# Altium PCB Main.PcbDoc (part 2 of 2)
Units mil, origin at the board's own origin, x right, y up, seen from the top; angles counter-clockwise.
Board outline 5500 x 5000 mil, 4 copper layers (Top Layer, Gnd 1, Interconnects, Gnd 2), stack 65.2 mil thick; 154 components, 128 nets, 570 pads, 1105 vias.
Unrouted connection lines stored in the file: 1.
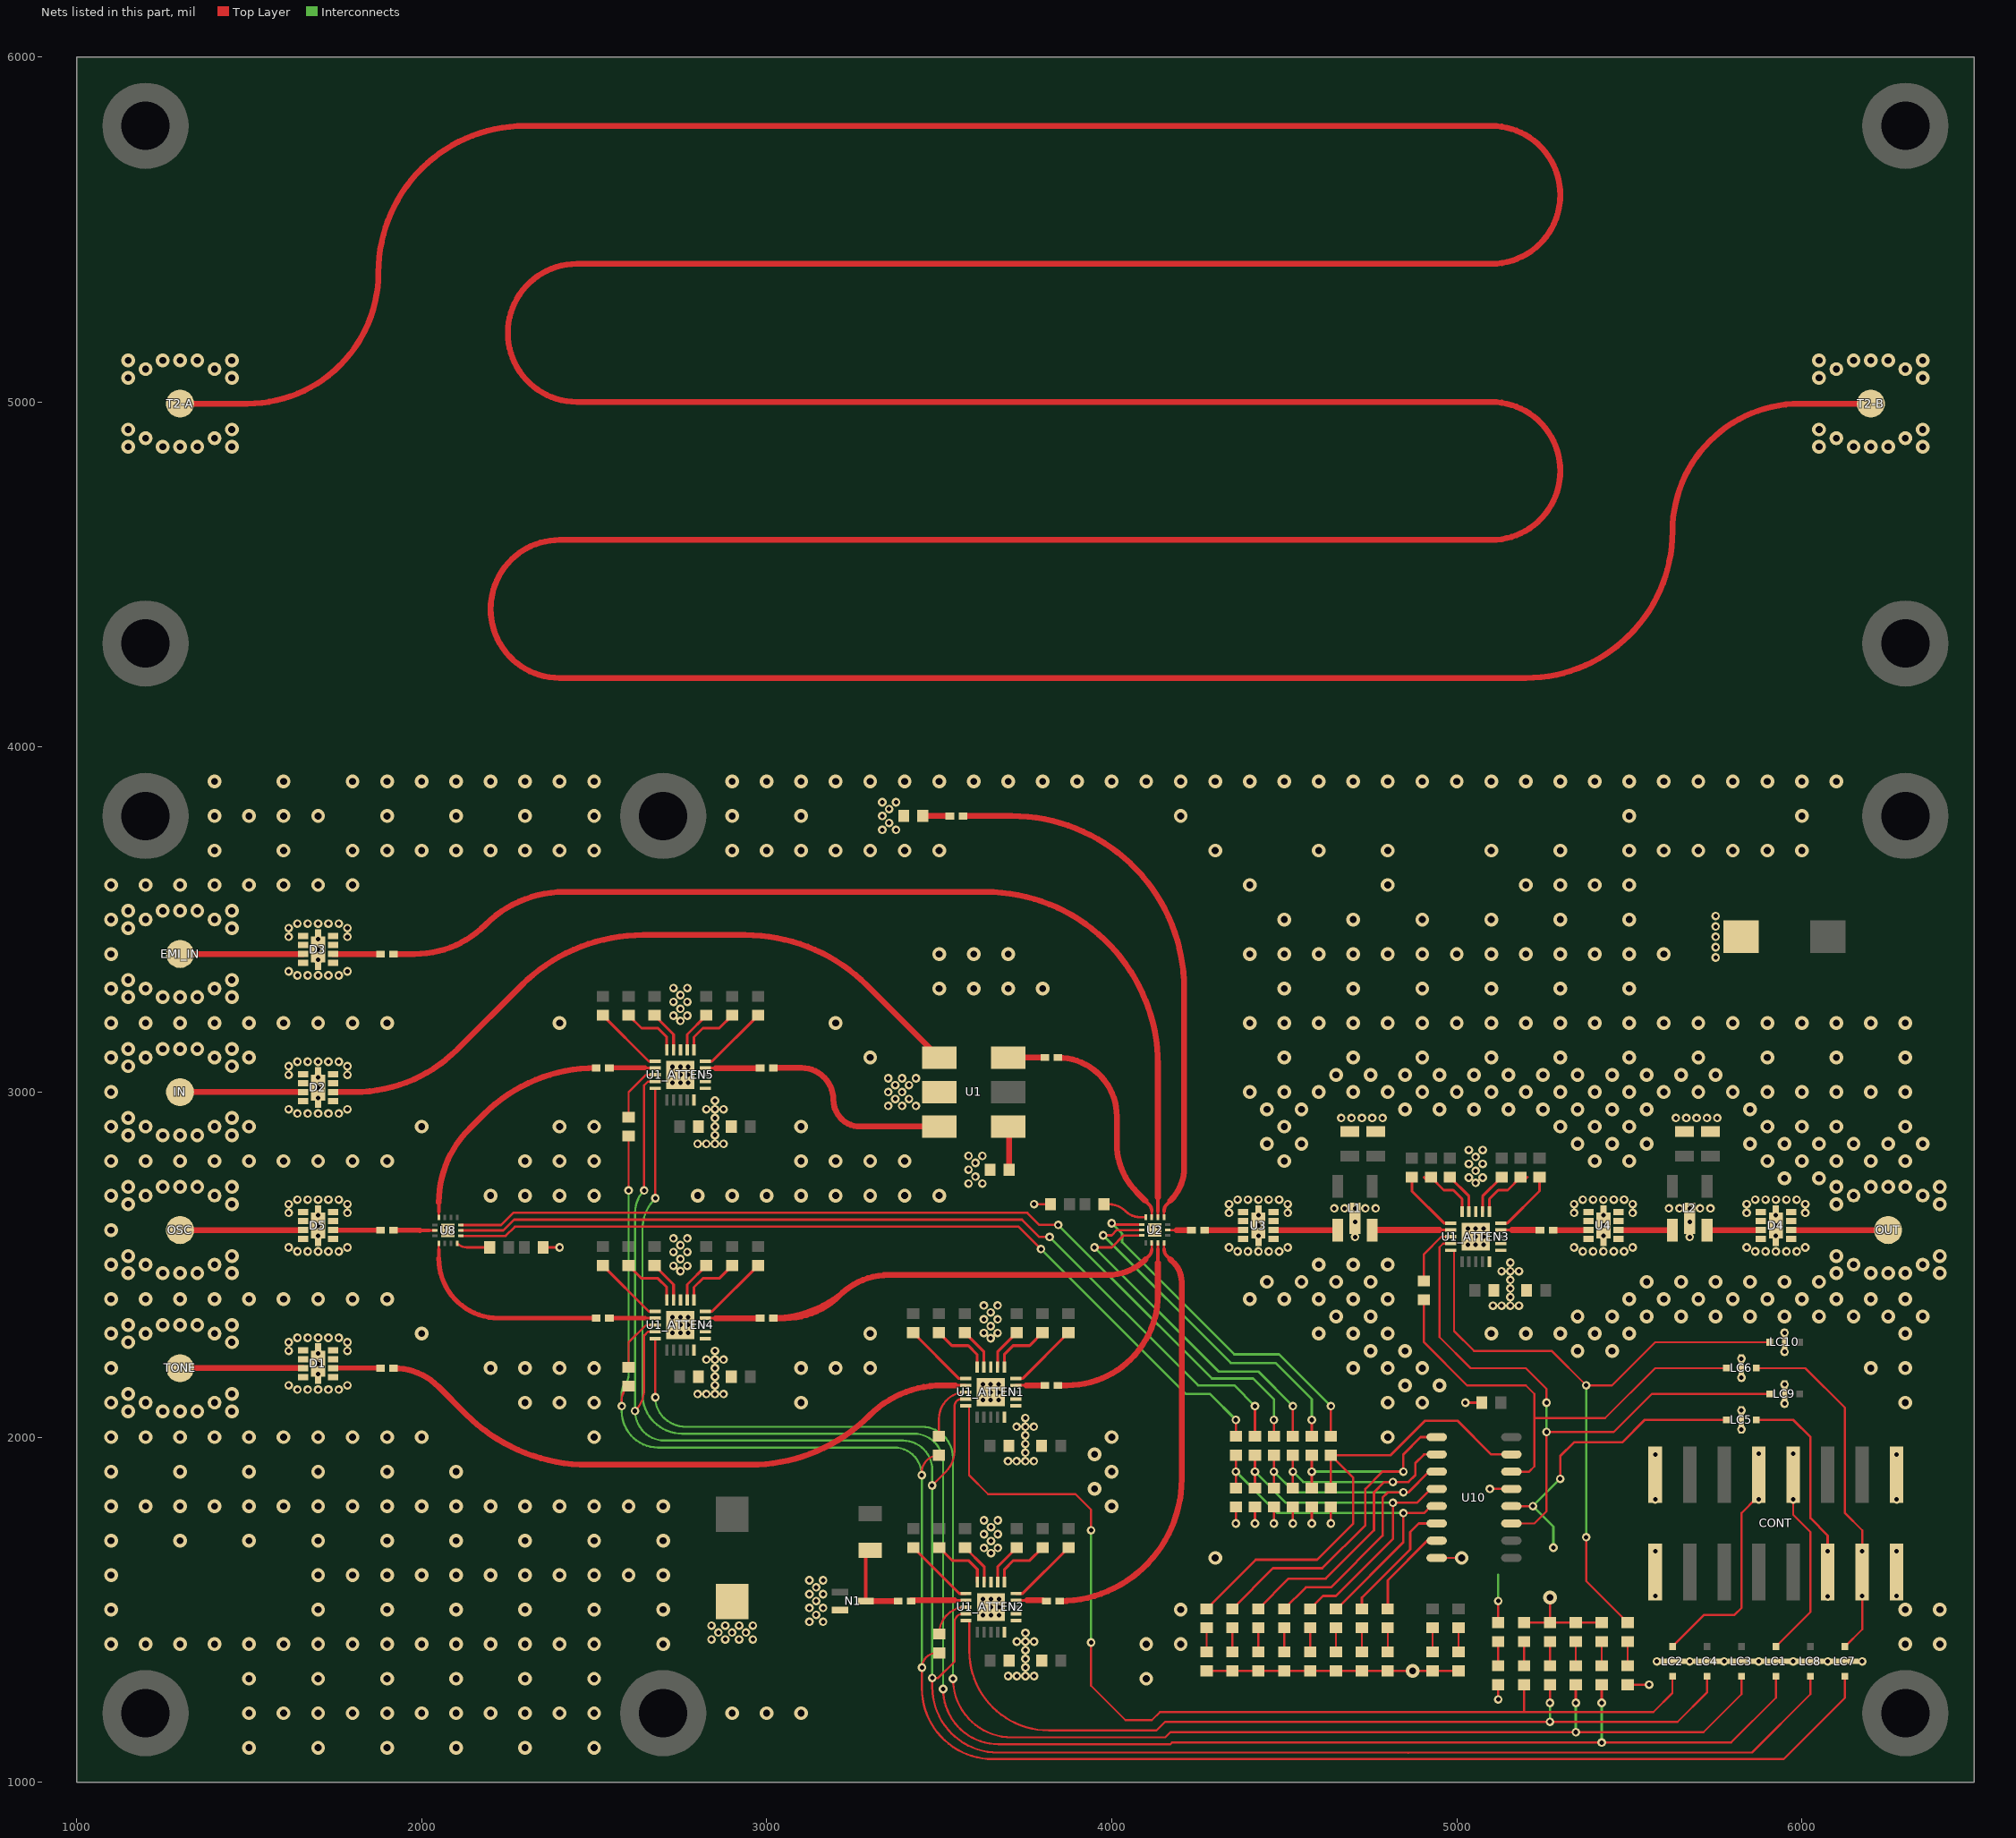
[diagram p4: the nets of this part, all layers, seen from the top]

## Via types
v1: diameter 40, hole 20, Top Layer to Gnd 2, tented both sides, 596 vias
v2: diameter 25, hole 13, Top Layer to Gnd 2, tented both sides, 454 vias
v3: diameter 25, hole 13, Top Layer to Gnd 2, 45 vias
v4: diameter 19.68, hole 7.87, Top Layer to Gnd 2, tented bottom, 8 vias
v5: diameter 45, hole 25, Top Layer to Gnd 2, tented both sides, 2 vias

## Nets (pads, with @x,y where several pads share a name; then routed paths per layer and width w, separated by ;. In a path a pad name is that pad's centre, name@x,y a point inside that pad or via, vN(x,y) a via of type N, cw(c..) or ccw(c..) an arc to the next point about the centre after c; other vN are vias at no path point) (continued)
GND: C4_ATTEN1.1 C4_ATTEN2.1 C4_ATTEN3.1 C4_ATTEN4.1 C4_ATTEN5.1 C6_ATTEN1.1 C6_ATTEN2.1 C6_ATTEN3.1 C6_ATTEN4.1 C6_ATTEN5.1 C9.1 C10.1 C12.1 C13.1 C18.1 C20.1 C21.1 C22.1 C23.1 C24.1 C25.1 C26.1 C30.1 C40.2 C41.2 CONT.1 CONT.2 CONT.15 CONT.16 D1.1 D1.3 D1.4 D1.5 D1.6 D1.8 D1.9 D1.10 D2.1 D2.3 D2.4 D2.5 D2.6 D2.8 D2.9 D2.10 D3.1 D3.3 D3.4 D3.5 D3.6 D3.8 D3.9 D3.10 D4.1 D4.3 D4.4 D4.5 D4.6 D4.8 D4.9 D4.10 D5.1 D5.3 D5.4 D5.5 D5.6 D5.8 D5.9 D5.10 DP1.2 DP2.2 DP3.2 DP4.2 DP5.2 DP6.2 DP7.2 DP8.2 DP9.2 DP10.2 DP11.2 DP12.2 DP13.2 DP14.2 DP15.2 DP16.2 EMI_IN.2 EMI_IN.3 EMI_IN.4 EMI_IN.5 IN.2 IN.3 IN.4 IN.5 L1.5 L2.5 LC1.2 LC2.2 LC3.2 LC4.2 LC5.2 LC6.2 LC7.2 LC8.2 LC9.2 LC10.2 N1.2 OSC.2 OSC.3 OSC.4 OSC.5 OUT.2 OUT.3 OUT.4 OUT.5 R1.1 R2.1 T2-A.2 T2-A.3 T2-A.4 T2-A.5 T2-B.2 T2-B.3 T2-B.4 T2-B.5 TONE.2 TONE.3 TONE.4 TONE.5 U1.2 U1_ATTEN1.10 U1_ATTEN1.11 U1_ATTEN1.12 U1_ATTEN1.18 U1_ATTEN1.21 U1_ATTEN2.10 U1_ATTEN2.11 U1_ATTEN2.12 U1_ATTEN2.18 U1_ATTEN2.21 U1_ATTEN3.10 U1_ATTEN3.11 U1_ATTEN3.12 U1_ATTEN3.18 U1_ATTEN3.21 U1_ATTEN4.10 U1_ATTEN4.11 U1_ATTEN4.12 U1_ATTEN4.18 U1_ATTEN4.21 U1_ATTEN5.10 U1_ATTEN5.11 U1_ATTEN5.12 U1_ATTEN5.18 U1_ATTEN5.21 U2.15 U3.1 U3.3 U3.4 U3.5 U3.6 U3.8 U3.9 U3.10 U4.1 U4.3 U4.4 U4.5 U4.6 U4.8 U4.9 U4.10 U8.15 U10.8 U10.13 | length 2284.1
  Top Layer w6: DP1.2@4275,1322.44 DP2.2@4350,1322.44 DP3.2@4425,1322.44 DP4.2@4500,1322.44 DP6.2@4650,1322.44 DP7.2@4725,1322.44 DP8.2@4800,1322.44 v1(4872.44,1322.44) DP10.2@4999.88,1322.44 ; U10.8@4941.73,1650 v1(5014.17,1650) ; DP14.2@5195,1462.56 DP13.2@5270,1462.56 ; v1(5270,1535) DP13.2@5270,1462.56 ; DP15.2@5420,1462.56 DP12.2@5345,1462.56 DP13.2@5270,1462.56 ; v2(5580,1350) LC2.2@5625,1350 LC4.2@5725,1350 LC3.2@5825,1350 LC1.2@5925,1350 LC8.2@6025,1350 LC7.2@6125,1350 v2(6175,1350)
  Top Layer w7: C30.1@2352.56,2550 v2(2400,2550) ; v2(3775,2675) C20.1@3822.44,2675 ; v2(4360,1750) C24.1@4360,1797.44 ; v2(4415,1750) C25.1@4415,1797.44 ; v2(4470,1750) C26.1@4470,1797.44 ; v2(4525,1750) C23.1@4525,1797.44 ; v2(4580,1750) C22.1@4580,1797.44 ; v2(4635,1750) C21.1@4635,1797.44 ; v2(5025,2100) C18.1@5072.44,2100 ; v2(5095.83,1850) U10.13@5158.27,1850 ; v2(5120,1240) DP11.2@5120,1282.44 ; DP16.2@5495,1282.44 v2(5557.44,1282.44)
  other v1: 1500,1100 1700,1100 1900,1100 2100,1100 2300,1100 2500,1100 1500,1200 1600,1200 1700,1200 1800,1200 1900,1200 2000,1200 2100,1200 2200,1200 2300,1200 2400,1200 2500,1200 2900,1200 3000,1200 3100,1200 1500,1300 1700,1300 1900,1300 2100,1300 2300,1300 2500,1300 4100,1300 1100,1400 1200,1400 1300,1400 1400,1400 1500,1400 1600,1400 1700,1400 1800,1400 1900,1400 2000,1400 2100,1400 2200,1400 2300,1400 2400,1400 2500,1400 2700,1400 4100,1400 4200,1400 6300,1400 6400,1400 1100,1500 1700,1500 1900,1500 2100,1500 2300,1500 2500,1500 2700,1500 4200,1500 6300,1500 6400,1500 1100,1600 1700,1600 1800,1600 1900,1600 2000,1600 2100,1600 2200,1600 2300,1600 2400,1600 2500,1600 2600,1600 2700,1600 4300,1650 1100,1700 1300,1700 1500,1700 1700,1700 1900,1700 2100,1700 2300,1700 2500,1700 2700,1700 1100,1800 1200,1800 1300,1800 1400,1800 1500,1800 1600,1800 1700,1800 1800,1800 1900,1800 2000,1800 2100,1800 2200,1800 2300,1800 2400,1800 2500,1800 2600,1800 2700,1800 4000,1800 3950,1850 1100,1900 1300,1900 1500,1900 1700,1900 1900,1900 2100,1900 4000,1900 3950,1950 1100,2000 1200,2000 1300,2000 1400,2000 1500,2000 1600,2000 1700,2000 1800,2000 1900,2000 2000,2000 2500,2000 4000,2000 4800,2000 1150,2075 1250,2075 1300,2075 1350,2075 1450,2075 1100,2100 2300,2100 2400,2100 2500,2100 3100,2100 4800,2100 4900,2100 6300,2100 1150,2125 1450,2125 4850,2150 4950,2150 1100,2200 2200,2200 2300,2200 2400,2200 2500,2200 3100,2200 3200,2200 3300,2200 4700,2200 4800,2200 4900,2200 6200,2200 6300,2200 4750,2250 4850,2250 5350,2250 5450,2250 1150,2275 1450,2275 1100,2300 2000,2300 3300,2300 4600,2300 4700,2300 4800,2300 5100,2300 5200,2300 5300,2300 5400,2300 5500,2300 6300,2300 1150,2325 1250,2325 1300,2325 1350,2325 1450,2325 4650,2350 4750,2350 5350,2350 5450,2350 5550,2350 5650,2350 5750,2350 5850,2350 5950,2350 6050,2350 6150,2350 6250,2350 6350,2350 1100,2400 1200,2400 1300,2400 1400,2400 1500,2400 1600,2400 1700,2400 1800,2400 1900,2400 4400,2400 4500,2400 4600,2400 4700,2400 4800,2400 5500,2400 5600,2400 5700,2400 5800,2400 5900,2400 6000,2400 6100,2400 6200,2400 6300,2400 4450,2450 4550,2450 4650,2450 4750,2450 5550,2450 5650,2450 5750,2450 5850,2450 5950,2450 6050,2450 1150,2475 1250,2475 1300,2475 1350,2475 1450,2475 6100,2475 6200,2475 6250,2475 6300,2475 6400,2475 1100,2500 4600,2500 4700,2500 4800,2500 1150,2525 1450,2525 6100,2525 6400,2525 1100,2600 1150,2675 1450,2675 6100,2675 6400,2675 1100,2700 2200,2700 2300,2700 2400,2700 2500,2700 2800,2700 2900,2700 3000,2700 3100,2700 3200,2700 3300,2700 3400,2700 3500,2700 1150,2725 1250,2725 1300,2725 1350,2725 1450,2725 6100,2725 6200,2725 6250,2725 6300,2725 6400,2725 5950,2750 6050,2750 1100,2800 1200,2800 1300,2800 1400,2800 1500,2800 1600,2800 1700,2800 1800,2800 1900,2800 2300,2800 2400,2800 2500,2800 3100,2800 3200,2800 3300,2800 3400,2800 4500,2800 5400,2800 5500,2800 5900,2800 6000,2800 6100,2800 6200,2800 6300,2800 4450,2850 4550,2850 5350,2850 5450,2850 5550,2850 5850,2850 5950,2850 6050,2850 6150,2850 6250,2850 6350,2850 1150,2875 1250,2875 1300,2875 1350,2875 1450,2875 1100,2900 1500,2900 2000,2900 2400,2900 2500,2900 3100,2900 4500,2900 5300,2900 5400,2900 5500,2900 5900,2900 6000,2900 6100,2900 6300,2900 1150,2925 1450,2925 4450,2950 4550,2950 4850,2950 4950,2950 5050,2950 5150,2950 5250,2950 5350,2950 5450,2950 5550,2950 5850,2950 1100,3000 4400,3000 4500,3000 4600,3000 4700,3000 4800,3000 4900,3000 5000,3000 5100,3000 5200,3000 5300,3000 5400,3000 5500,3000 5600,3000 5700,3000 5800,3000 5900,3000 6000,3000 6100,3000 6200,3000 6300,3000 4650,3050 4750,3050 4850,3050 4950,3050 5050,3050 5150,3050 5250,3050 5350,3050 5450,3050 5550,3050 5650,3050 5750,3050 1150,3075 1450,3075 1100,3100 1500,3100 3300,3100 4500,3100 4700,3100 4900,3100 5100,3100 5300,3100 5500,3100 5700,3100 5900,3100 6100,3100 6300,3100 1150,3125 1250,3125 1300,3125 1350,3125 1450,3125 1100,3200 1200,3200 1300,3200 1400,3200 1500,3200 1600,3200 1700,3200 1800,3200 1900,3200 2400,3200 3200,3200 4400,3200 4500,3200 4600,3200 4700,3200 4800,3200 4900,3200 5000,3200 5100,3200 5200,3200 5300,3200 5400,3200 5500,3200 5600,3200 5700,3200 5800,3200 5900,3200 6000,3200 6100,3200 6200,3200 6300,3200 1150,3275 1250,3275 1300,3275 1350,3275 1450,3275 1100,3300 3500,3300 3600,3300 3700,3300 3800,3300 4500,3300 4700,3300 4900,3300 5100,3300 5300,3300 5500,3300 1150,3325 1450,3325 1100,3400 3500,3400 3600,3400 3700,3400 4400,3400 4500,3400 4600,3400 4700,3400 4800,3400 4900,3400 5000,3400 5100,3400 5200,3400 5300,3400 5400,3400 5500,3400 5600,3400 1150,3475 1450,3475 1100,3500 4500,3500 4700,3500 4900,3500 5100,3500 5300,3500 5500,3500 1150,3525 1250,3525 1300,3525 1350,3525 1450,3525 1100,3600 1200,3600 1300,3600 1400,3600 1500,3600 1600,3600 1700,3600 1800,3600 4400,3600 4800,3600 5200,3600 5300,3600 5400,3600 5500,3600 1400,3700 1600,3700 1800,3700 1900,3700 2000,3700 2100,3700 2200,3700 2300,3700 2400,3700 2500,3700 2900,3700 3000,3700 3100,3700 3200,3700 3300,3700 3400,3700 3500,3700 4300,3700 4600,3700 4800,3700 5100,3700 5300,3700 5500,3700 5600,3700 5700,3700 5800,3700 5900,3700 6000,3700 1400,3800 1500,3800 1600,3800 1700,3800 1900,3800 2100,3800 2300,3800 2500,3800 2900,3800 3100,3800 4200,3800 5500,3800 6000,3800 1400,3900 1600,3900 1800,3900 1900,3900 2000,3900 2100,3900 2200,3900 2300,3900 2400,3900 2500,3900 2900,3900 3000,3900 3100,3900 3200,3900 3300,3900 3400,3900 3500,3900 3600,3900 3700,3900 3800,3900 3900,3900 4000,3900 4100,3900 4200,3900 4300,3900 4400,3900 4500,3900 4600,3900 4700,3900 4800,3900 4900,3900 5000,3900 5100,3900 5200,3900 5300,3900 5400,3900 5500,3900 5600,3900 5700,3900 5800,3900 5900,3900 6000,3900 6100,3900 1150,4870 1250,4870 1300,4870 1350,4870 1450,4870 6050,4870 6150,4870 6200,4870 6250,4870 6350,4870 1150,4920 1450,4920 6050,4920 6350,4920 1150,5070 1450,5070 6050,5070 6350,5070 1150,5120 1250,5120 1300,5120 1350,5120 1450,5120 6050,5120 6150,5120 6200,5120 6250,5120 6350,5120
  other v2: 3700,1307.56 3725,1307.56 3750,1307.56 3775,1307.56 3750,1332.56 5675,1350 5775,1350 5875,1350 5975,1350 6075,1350 3750,1357.56 3750,1382.56 3725,1407.56 3750,1407.56 3775,1407.56 2840,1413.66 2880,1413.66 2920,1413.66 2960,1413.66 3750,1432.56 2860,1433.66 2900,1433.66 2940,1433.66 2840,1453.66 2880,1453.66 2920,1453.66 2960,1453.66 3123.66,1465 3163.66,1465 3143.66,1485 3123.66,1505 3163.66,1505 3143.66,1525 5575,1540 6275,1540 3123.66,1545 3163.66,1545 3143.66,1565 3123.66,1585 3163.66,1585 3650,1663.86 5575,1670 6275,1670 3630,1678.86 3670,1678.86 3650,1698.86 3630,1718.86 3670,1718.86 3650,1738.86 3630,1758.86 3670,1758.86 5575,1820 6275,1820 3699.43,1930.33 3724.43,1930.33 3749.43,1930.33 3774.43,1930.33 5575,1950 6275,1950 3749.43,1955.33 3749.43,1980.33 3749.43,2005.33 5825,2022.44 3724.43,2030.33 3749.43,2030.33 3774.43,2030.33 3749.43,2055.33 5825,2077.56 5950,2097.44 2800,2125 2825,2125 2850,2125 2875,2125 1640,2138 1670,2138 1700,2138 1730,2138 1760,2138 1615,2150 1785,2150 2850,2150 5950,2152.56 5825,2172.44 2850,2175 1700,2183 2850,2200 1700,2213 2825,2225 2850,2225 2875,2225 5825,2227.56 1700,2243 5950,2247.44 1615,2250 1785,2250 2850,2250 1615,2275 1785,2275 3649.43,2286.63 1640,2288 1670,2288 1700,2288 1730,2288 1760,2288 3629.43,2301.63 3669.43,2301.63 5950,2302.56 3649.43,2321.63 3629.43,2341.63 3669.43,2341.63 3649.43,2361.63 5104.98,2380.77 5129.98,2380.77 5154.98,2380.77 5179.98,2380.77 3629.43,2381.63 3669.43,2381.63 5154.98,2405.77 5154.98,2430.77 5154.98,2455.77 2750,2481.3 5129.98,2480.77 5154.98,2480.77 5179.98,2480.77 2730,2496.3 2770,2496.3 5154.98,2505.77 2750,2516.3 2730,2536.3 2770,2536.3 1640,2538 1670,2538 1700,2538 1730,2538 1760,2538 4365,2538 4395,2538 4425,2538 4455,2538 4485,2538 5365,2538 5395,2538 5425,2538 5455,2538 5485,2538 5865,2538 5895,2538 5925,2538 5955,2538 5985,2538 1615,2550 1785,2550 4340,2550 4510,2550 5340,2550 5510,2550 5840,2550 6010,2550 2750,2556.3 2730,2576.3 2770,2576.3 4705,2580 5675,2580 1700,2583 4425,2583 5425,2583 5925,2583 1700,2613 4425,2613 5425,2613 5925,2613 4705,2624 5675,2624 1700,2643 4425,2643 5425,2643 5925,2643 1615,2650 1785,2650 4340,2650 4510,2650 5340,2650 5510,2650 5840,2650 6010,2650 4645,2663 4675,2663 4705,2663 4735,2663 4765,2663 5615,2663 5645,2663 5675,2663 5705,2663 5735,2663 1615,2675 1785,2675 4340,2675 4510,2675 5340,2675 5510,2675 5840,2675 6010,2675 1640,2688 1670,2688 1700,2688 1730,2688 1760,2688 4365,2688 4395,2688 4425,2688 4455,2688 4485,2688 5365,2688 5395,2688 5425,2688 5455,2688 5485,2688 5865,2688 5895,2688 5925,2688 5955,2688 5985,2688 3585,2735 3625,2735 5054.98,2737.07 5034.98,2752.07 5074.98,2752.07 3605,2755 5054.98,2772.07 3585,2775 5034.98,2792.07 5074.98,2792.07 3605,2795 5054.98,2812.07 3585,2815 3625,2815 5034.98,2832.07 5074.98,2832.07 2800,2850 2825,2850 2850,2850 2875,2850 2850,2875 2850,2900 2850,2925 4665,2925 4695,2925 4725,2925 4755,2925 4785,2925 5635,2925 5665,2925 5695,2925 5725,2925 5755,2925 1640,2938 1670,2938 1700,2938 1730,2938 1760,2938 1615,2950 1785,2950 2825,2950 2850,2950 2875,2950 3352.56,2960 3392.56,2960 3432.56,2960 2850,2975 3372.56,2980 3412.56,2980 1700,2983 3352.56,3000 3392.56,3000 1700,3013 3372.56,3020 3412.56,3020 3352.56,3040 3392.56,3040 3432.56,3040 1700,3043 1615,3050 1785,3050 1615,3075 1785,3075 1640,3088 1670,3088 1700,3088 1730,3088 1760,3088 2750,3206.3 2730,3221.3 2770,3221.3 2750,3241.3 2730,3261.3 2770,3261.3 2750,3281.3 2730,3301.3 2770,3301.3 1640,3338 1670,3338 1700,3338 1730,3338 1760,3338 1615,3350 1785,3350 1700,3383 5750.12,3390 1700,3413 5750.12,3420 1700,3443 1615,3450 1785,3450 5750.12,3450 1615,3475 1785,3475 5750.12,3480 1640,3488 1670,3488 1700,3488 1730,3488 1760,3488 5750.12,3510 3335,3760 3375,3760 3355,3780 3335,3800 3355,3820 3335,3840 3375,3840
  other v3: 3627,1484.56 3650,1484.56 3673,1484.56 3627,1507.56 3650,1507.56 3673,1507.56 3627,1530.56 3650,1530.56 3673,1530.56 3626.43,2107.33 3649.43,2107.33 3672.43,2107.33 3626.43,2130.33 3649.43,2130.33 3672.43,2130.33 3626.43,2153.33 3649.43,2153.33 3672.43,2153.33 2727,2302 2750,2302 2773,2302 2727,2325 2750,2325 2773,2325 2727,2348 2750,2348 2773,2348 5031.98,2557.77 5054.98,2557.77 5077.98,2557.77 5031.98,2580.77 5054.98,2580.77 5077.98,2580.77 5031.98,2603.77 5054.98,2603.77 5077.98,2603.77 2727,3027 2750,3027 2773,3027 2727,3050 2750,3050 2773,3050 2727,3073 2750,3073 2773,3073
  other v4: 2068.55,2591.07 2084.3,2591.07 4117.13,2592.13 4132.87,2592.13 2068.55,2606.82 2084.3,2606.82 4117.13,2607.87 4132.87,2607.87
MOSI: CONT.13 LC6.3 LC7.3 | length 973.4
  Top Layer w6: LC6.3@5868.31,2200 6010,2200 6125,2085 6125,1780 6175,1730 CONT.13@6175,1604 ; LC7.3@6125,1393.31 6175,1443.31 v2(6175,1540)
  other v2: 6175,1670
NetC1_1: C1.1 D1.7 | length 137.3
  Top Layer w13.96: D1.7@1743.7,2200.01 C1.1@1880.98,2200
NetC1_2: C1.2 U1_ATTEN1.2 | length 1805.8
  Top Layer w8: 3547.06,2150.02 U1_ATTEN1.2@3576.79,2150.02
  Top Layer w17: C1.2@1919.02,2200 cw(c1919.02,2016.56) 2048.73,2146.27 2128.55,2066.45 ccw(c2482.11,2420) 2482.11,1920 2953.22,1920 ccw(c2953.22,2407.13) 3144.67,1959.2 ccw(c2953.22,2407.13) 3297.68,2062.68 cw(c3508.53,1851.83) 3387.44,2124.32 cw(c3508.53,1851.83) 3508.53,2150.02 3547.06,2150.02
NetC2_1: C2.1 U1_ATTEN1.14 | length 74.7
  Top Layer w8: U1_ATTEN1.14@3722.06,2150.02 3751.79,2150.02
  Top Layer w17: 3751.79,2150.02 C2.1@3796.8,2150.02
NetC2_2: C2.2 U2.10 | length 589.3
  Top Layer w7: 4133.86,2545 U2.10@4133.86,2562.6
  Top Layer w10: 4133.86,2505 4133.86,2545
  Top Layer w17: C2.2@3844.02,2150 3870.28,2150 ccw(c3870.28,2413.58) 4133.86,2413.58 4133.86,2505
NetC3_1: C3.1 U1.6 | length 100
  Top Layer w17: U1.6@3700,3100 C3.1@3800,3100
NetC3_2: C3.2 U2.3 | length 592.3
  Top Layer w7: U2.3@4116.14,2637.4 4116.14,2655
  Top Layer w10: 4097.72,2685 4107.96,2674.76 cw(c4088.2,2655) 4116.14,2655
  Top Layer w17: C3.2@3844.02,3100 cw(c3844.02,2929.02) 4015,2929.02 4015,2850 ccw(c4213.65,2850) 4073.18,2709.53 4097.72,2685
NetC4_1: C4.1 R2.2 | length 78.4
  Top Layer w17: R2.2@3452.56,3800 C4.1@3530.98,3800
NetC4_2: C4.2 U2.1 | length 1606.1
  Top Layer w7: U2.1@4151.57,2637.4 4151.57,2655
  Top Layer w10: 4151.57,2655 cw(c4179.52,2655) 4159.76,2674.76 4170,2685
  Top Layer w17: C4.2@3569.02,3800 3710,3800 cw(c3710,3300) 4210,3300 4210,2781.57 cw(c4073.43,2781.57) 4170,2685
NetC5_1: C5.1 N1.3 R3.1 | length 247.6
  Top Layer w10: N1.3@3287.4,1525 3287.4,1659.25 cw(c3300,1659.25) R3.1@3300,1671.85
  Top Layer w17: N1.3@3287.4,1525 C5.1@3380.98,1525
NetC5_2: C5.2 U1_ATTEN2.2 | length 155.7
  Top Layer w8: 3547.64,1527.24 U1_ATTEN2.2@3577.36,1527.24
  Top Layer w17: C5.2@3419.05,1527.24 3545.02,1527.24
NetC6_1: C6.1 U1_ATTEN2.14 | length 74.7
  Top Layer w8: U1_ATTEN2.14@3722.64,1527.24 3752.36,1527.24
  Top Layer w17: 3754.98,1527.24 C6.1@3800,1527.24
NetC6_2: C6.2 U2.11 | length 1256.1
  Top Layer w7: 4151.57,2545 U2.11@4151.57,2562.6
  Top Layer w10: 4151.57,2545 ccw(c4179.52,2545) 4159.76,2525.24 4170,2515
  Top Layer w17: C6.2@3849.02,1525 ccw(c3849.02,1878.7) 4202.72,1878.7 4202.72,2450 ccw(c4124.78,2450) 4179.89,2505.11 4170,2515
NetC7_1: C7.1 D3.7 | length 137.3
  Top Layer w17: D3.7@1743.7,3400.01 C7.1@1880.98,3400
NetC7_2: C7.2 U2.2 | length 2991
  Top Layer w7: U2.2@4133.86,2637.4 4133.86,2655
  Top Layer w10: 4133.86,2655 4133.86,2695
  Top Layer w17: C7.2@1919.02,3400 1980,3400 ccw(c1980,3689.71) 2184.85,3484.85 cw(c2414.56,3255.15) 2414.56,3580 3633.86,3580 cw(c3633.86,3080) 4133.86,3080 4133.86,2695
NetC8_1: C8.1 U2.13 | length 68.6
  Top Layer w7: U2.13@4162.4,2600 4187.99,2600
  Top Layer w17: 4187.99,2600 C8.1@4230.98,2600
NetC8_2: C8.2 U3.2 | length 112.3
  Top Layer w17: C8.2@4269.02,2600 U3.2@4381.3,2600.01
NetC14_1: C14.1 U1_ATTEN3.14 | length 110.7
  Top Layer w8: U1_ATTEN3.14@5127.62,2600.46 5157.35,2600.46
  Top Layer w17: 5159.97,2600.46 C14.1@5240.98,2600.46
NetC14_2: C14.2 U4.2 | length 101.3
  Top Layer w17: C14.2@5280,2600.01 U4.2@5381.3,2600.01
NetC15_1: C15.1 U8.11 | length 701.7
  Top Layer w7: U8.11@2049.85,2636.34 2049.85,2653.94
  Top Layer w10: 2049.85,2653.94 2049.85,2680
  Top Layer w17: 2049.85,2680 cw(c2351.26,2680) 2138.13,2893.13 2179.95,2934.95 cw(c2505.98,2608.92) C15.1@2505.98,3070
NetC15_2: C15.2 U1_ATTEN5.2 | length 133.7
  Top Layer w8: 2647.64,3069.68 U1_ATTEN5.2@2677.36,3069.68
  Top Layer w13.96: C15.2@2544.02,3069.68 C15.2@2544.02,3070 2647.64,3070
NetC16_1: C16.1 U1_ATTEN5.14 | length 158
  Top Layer w8: U1_ATTEN5.14@2822.64,3069.68 2852.36,3069.68
  Top Layer w17: 2852.36,3069.68 C16.1@2980.67,3069.68
NetC16_2: C16.2 U1.3 | length 578
  Top Layer w17: C16.2@3019.02,3070 3101.19,3070 cw(c3101.19,2977.81) 3193.38,2977.81 ccw(c3271.19,2977.81) 3271.19,2900 U1.3@3500,2900
NetC17_1: C17.1 U8.1 | length 598.5
  Top Layer w7: 2049.85,2543.94 U8.1@2049.85,2561.54
  Top Layer w10: 2049.85,2517.88 2049.85,2543.94
  Top Layer w13.96: 2049.85,2517.88 ccw(c2222.73,2517.88) 2222.73,2345 C17.1@2505.98,2345
NetC17_2: C17.2 U1_ATTEN4.2 | length 133.3
  Top Layer w8: 2647.64,2344.68 U1_ATTEN4.2@2677.36,2344.68
  Top Layer w13.96: C17.2@2544.02,2345 2647.64,2345
NetC19_1: C19.1 U1_ATTEN4.14 | length 158.5
  Top Layer w8: U1_ATTEN4.14@2822.64,2344.68 2852.36,2344.68
  Top Layer w17: 2852.36,2344.68 2980.67,2344.68 C19.1@2980.98,2345
NetC19_2: C19.2 U2.9 | length 1387.8
  Top Layer w7: 4116.14,2545 U2.9@4116.14,2562.6
  Top Layer w10: 4097.72,2515 4107.96,2525.24 ccw(c4088.2,2545) 4116.14,2545
  Top Layer w17: C19.2@3015.65,2345 ccw(c3015.65,2669.35) 3210.94,2410.38 ; C19.2@3019.02,2345 3053.09,2345 ccw(c3053.09,2568.23) 3210.94,2410.38 ; 4097.72,2515 cw(c4013.22,2599.5) 4097.64,2514.92 cw(c3989.19,2623.37) 3989.19,2470 3354.87,2470 ccw(c3354.87,2266.45) 3237.56,2432.8 ccw(c3354.87,2266.45) 3210.94,2410.38
NetC21_2: C21.2 R21.2 RL1.1 U10.15 | length 1451.8
  Top Layer w7: RL1.1@4275,1502.56 4417.44,1645 4595,1645 4700,1750 4700,1882.44 R21.2@4635,1947.44 ; C21.2@4635,1852.56 R21.2@4635,1947.44 ; U10.15@5158.27,1950 5100,1950 5002.56,2047.44 4907.44,2047.44 4807.44,1947.44 R21.2@4635,1947.44
NetC22_2: C22.2 R22.2 RL2.1 U10.1 | length 1248.5
  Top Layer w7: RL2.1@4350,1502.56 4467.44,1620 4610,1620 4735,1745 4735,1850 4785,1900 v2(4845,1900) 4845,1950 4895,2000 U10.1@4941.73,2000 ; C22.2@4580,1852.56 v2(4580,1900) R22.2@4580,1947.44
  Interconnects w7: v2(4580,1900) v2(4845,1900)
NetC23_2: C23.2 R23.2 RL3.1 U10.2 | length 1184.3
  Top Layer w7: RL3.1@4425,1502.56 4512.44,1590 4620,1590 4760,1730 4760,1840 4790,1870 v2(4815,1870) 4860,1870 4879.95,1889.95 4879.95,1924.95 4905,1950 U10.2@4941.73,1950 ; C23.2@4525,1852.56 v2(4525,1900) R23.2@4525,1947.44
  Interconnects w7: v2(4525,1900) 4555,1870 v2(4815,1870)
NetC24_2: C24.2 R24.1 RL6.1 U10.5 | length 1094
  Top Layer w7: C24.2@4360,1852.56 v2(4360,1900) R24.1@4360,1947.44 ; RL6.1@4650,1502.56 4651.97,1502.56 4845,1695.59 v2(4845,1780) 4905,1780 4925,1800 U10.5@4941.73,1800
  Interconnects w7: v2(4360,1900) 4480,1780 v2(4845,1780)
NetC25_2: C25.2 R25.1 RL5.1 U10.4 | length 1087.6
  Top Layer w7: C25.2@4415,1852.56 v2(4415,1900) R25.1@4415,1947.44 ; RL5.1@4575,1502.56 4612.44,1540 4650,1540 4815,1705 v2(4815,1810) 4885,1810 U10.4@4925,1850
  Interconnects w7: v2(4415,1900) 4505,1810 v2(4815,1810)
NetC26_2: C26.2 R26.1 RL4.1 U10.3 | length 1165.5
  Top Layer w7: C26.2@4470,1852.56 v2(4470,1900) R26.1@4470,1947.44 ; RL4.1@4500,1502.56 4562.44,1565 4635,1565 4785,1715 4785,1825 4800,1840 v2(4845,1840) 4860,1840 4920,1900 U10.3@4941.73,1900
  Interconnects w7: v2(4470,1900) 4530,1840 v2(4845,1840)
NetC27_1: C27.1 D5.7 | length 137.3
  Top Layer w13.96: D5.7@1743.7,2600.01 C27.1@1880.98,2600
NetC27_2: C27.2 U8.13 | length 122.3
  Top Layer w7: 2021.42,2598.94 U8.13@2039.02,2598.94
  Top Layer w10: 1995.36,2598.94 2021.42,2598.94
  Top Layer w13.96: C27.2@1920.07,2598.94 cw(c1920.07,2600) C27.2@1919.02,2600 1994.31,2600 cw(c1994.31,2598.94) 1995.36,2598.94
NetD1_2: D1.2 TONE.1 | length 356.3
  Top Layer w17: TONE.1@1300,2200 D1.2@1656.3,2200.01
NetD2_2: D2.2 IN.1 | length 356.3
  Top Layer w17: IN.1@1300,3000 D2.2@1656.3,3000.01
NetD2_7: D2.7 U1.1 | length 2030.6
  Top Layer w17: D2.7@1743.7,3000.01 1805.29,3000.01 ccw(c1805.29,3421.82) 2103.55,3123.55 2288.55,3308.55 cw(c2642.11,2955) 2642.11,3455 2937.89,3455 cw(c2937.89,2955) 3291.45,3308.55 U1.1@3500,3100
NetD3_2: D3.2 EMI_IN.1 | length 356.3
  Top Layer w17: EMI_IN.1@1300,3400 D3.2@1656.3,3400.01
NetD4_2: D4.2 L2.2 | length 156.3
  Top Layer w17: L2.2@5725,2600 D4.2@5881.3,2600.01
NetD4_7: D4.7 OUT.1 | length 281.3
  Top Layer w17: D4.7@5968.7,2600.01 OUT.1@6250,2600
NetD5_2: D5.2 OSC.1 | length 356.3
  Top Layer w17: OSC.1@1300,2600 D5.2@1656.3,2600.01
NetDP1_1: DP1.1 RL1.2 | length 69.9
  Top Layer w6: DP1.1@4275,1377.56 RL1.2@4275,1447.44
NetDP2_1: DP2.1 RL2.2 | length 69.9
  Top Layer w6: DP2.1@4350,1377.56 RL2.2@4350,1447.44
NetDP3_1: DP3.1 RL3.2 | length 69.9
  Top Layer w6: DP3.1@4425,1377.56 RL3.2@4425,1447.44
NetDP4_1: DP4.1 RL4.2 | length 69.9
  Top Layer w6: DP4.1@4500,1377.56 RL4.2@4500,1447.44
NetDP5_1: DP5.1 RL5.2 | length 69.9
  Top Layer w6: DP5.1@4575,1377.56 RL5.2@4575,1447.44
NetDP6_1: DP6.1 RL6.2 | length 69.9
  Top Layer w6: DP6.1@4650,1377.56 RL6.2@4650,1447.44
NetDP7_1: DP7.1 RL7.2 | length 69.9
  Top Layer w6: DP7.1@4725,1377.56 RL7.2@4725,1447.44
NetDP8_1: DP8.1 RL8.2 | length 69.9
  Top Layer w6: DP8.1@4800,1377.56 RL8.2@4800,1447.44
NetDP9_1: DP9.1 RL9.2 | length 69.9
  Top Layer w6: DP9.1@4930,1377.56 RL9.2@4930,1447.44
NetDP10_1: DP10.1 RL10.2 | length 69.9
  Top Layer w6: DP10.1@5005,1377.56 RL10.2@5005,1447.44
NetDP11_1: DP11.1 RL11.2 | length 69.9
  Top Layer w6: DP11.1@5120,1337.56 RL11.2@5120,1407.44
NetDP12_1: DP12.1 RL12.2 | length 69.9
  Top Layer w6: RL12.2@5345,1337.56 DP12.1@5345,1407.44
NetDP13_1: DP13.1 RL13.2 | length 69.9
  Top Layer w6: RL13.2@5270,1337.56 DP13.1@5270,1407.44
NetDP14_1: DP14.1 RL14.2 | length 69.9
  Top Layer w6: RL14.2@5195,1337.56 DP14.1@5195,1407.44
NetDP15_1: DP15.1 RL15.2 | length 69.9
  Top Layer w6: RL15.2@5420,1337.56 DP15.1@5420,1407.44
NetDP16_1: DP16.1 RL16.2 | length 69.9
  Top Layer w6: DP16.1@5495,1330.67 RL16.2@5495,1400.55
NetL1_1: L1.1 U3.7 | length 186.3
  Top Layer w17: U3.7@4468.7,2600.01 L1.1@4655,2600
NetL1_2: L1.2 U1_ATTEN3.2 | length 224.7
  Top Layer w8: 4952.62,2600.46 U1_ATTEN3.2@4982.35,2600.46
  Top Layer w17: L1.2@4755,2600.46 4950,2600.46
NetL2_1: L2.1 U4.7 | length 141.3
  Top Layer w17: U4.7@5468.7,2600.01 L2.1@5610,2600
NetLC1_1: LC1.1 RL15.1 U1_ATTEN5.5 | length 5326.2
  Top Layer w6: v2(2677.36,2692.64) U1_ATTEN5.5@2677.36,3010.63 ; v2(3511.44,1270) ccw(c3671.44,1270) 3671.44,1110 4170,1110 4175,1115 v2(5420,1115) 5795,1115 5925,1245 LC1.1@5925,1306.69
  Top Layer w7: v2(5420,1230) RL15.1@5420,1282.44
  Interconnects w6: v2(2677.36,2692.64) ccw(c2767.56,2602.44) 2640,2602.44 2640,2125 ccw(c2755,2125) 2755,2010 3426.44,2010 cw(c3426.44,1925) 3511.44,1925 v2(3511.44,1270)
  Interconnects w7: v2(5420,1115) v2(5420,1230)
NetLC2_1: LC2.1 RL14.1 U1_ATTEN1.5 | length 2991.7
  Top Layer w6: U1_ATTEN1.5@3586.79,2090.96 3586.79,1890 3641.79,1835 3895,1835 3940,1790 v2(3940,1730) ; v2(3940,1405) 3940,1280 4040,1180 4116.5,1180 4140,1203.5 5195,1203.5 5570,1203.5 5625,1258.5 LC2.1@5625,1306.69
  Top Layer w7: 5195,1203.5 RL14.1@5195,1282.44
  Interconnects w6: v2(3940,1405) v2(3940,1730)
NetLC3_1: LC3.1 RL12.1 U1_ATTEN4.5 | length 4395.4
  Top Layer w6: v2@2677.36,2115.44 U1_ATTEN4.5@2677.36,2285.63 ; v2(3540,1300) ccw(c3710,1300) 3710,1130 4155,1130 4170,1145 5715,1145 5825,1255 LC3.1@5825,1306.69
  Top Layer w7: v2(5345,1230) RL12.1@5345,1282.44
  Interconnects w6: v2(2677.14,2115.44) ccw(c2759.99,2115.44) 2701.4,2056.86 ccw(c2766.24,2121.69) 2704.84,2053.59 ccw(c2766.24,2121.69) 2766.24,2030 3450,2030 cw(c3450,1940) 3540,1940 v2(3540,1300)
  Interconnects w7: v2(5345,1145) v2(5345,1230)
NetLC4_1: LC4.1 RL13.1 U1_ATTEN2.5 | length 2766.9
  Top Layer w6: U1_ATTEN2.5@3587.36,1468.19 3587.36,1380 ccw(c3817.36,1380) 3817.36,1150 4130,1150 4154.88,1174.88 5470,1174.88 ; v2(5270,1174.88) 5470,1174.88 ; LC4.1@5725,1306.69 5725,1260 5639.88,1174.88 5470,1174.88
  Top Layer w7: v2@5270,1220 v2(5270,1230) RL13.1@5270,1282.44
  Interconnects w7: v2(5270,1174.88) v2(5270,1230)
NetLC5_1: LC5.1 RL11.1 U10.12 | length 1048.2
  Top Layer w7: RL11.1@5120,1462.56 v2(5120,1525) ; U10.12@5158.27,1800 v2(5220.71,1800) ; v2(5300,1879.29) 5300,1945 5340,1985 5480,1985 5545,2050 LC5.1@5781.69,2050
  Interconnects w7: v2(5120,1525) 5120,1600.71 ; v2(5280,1680) 5280,1740.71 v2(5220.71,1800) v2(5300,1879.29)
NetLC6_1: LC6.1 R7_ATTEN3.2 U10.14 | length 1404.7
  Top Layer w6: R7_ATTEN3.2@4905,2397.88 4905,2275 5030,2150 5200,2150 5225,2125 5225,1915 5210,1900 U10.14@5158.27,1900 ; 5225,2055 5430,2055 5575,2200 LC6.1@5781.69,2200
NetLC7_1: LC7.1 R7_ATTEN1.2 R7_ATTEN2.2 R7_ATTEN4.2 R7_ATTEN5.2 | length 5554.8
  Top Layer w6: v2(2580,2090) 2580,2108.72 cw(c2625.2,2108.72) 2593.24,2140.68 R7_ATTEN4.2@2600,2147.44 ; v2(2600,2715) R7_ATTEN5.2@2600,2872.44 ; v2@3449.44,1897.44 cw(c3499.44,1897.44) R7_ATTEN1.2@3499.44,1947.44 ; R7_ATTEN2.2@3500.02,1374.67 3492.46,1374.67 ccw(c3492.46,1332.23) v2(3450.02,1332.23) 3450.02,1272.12 ccw(c3655.24,1272.12) 3655.24,1066.89 5946.89,1066.89 6125,1245 LC7.1@6125,1306.69
  Interconnects w6: v2(2600,2715) 2600,2179.14 cw(c2565.86,2179.14) 2590,2155 ccw(c2614.14,2130.86) 2580,2130.86 v2(2580,2090) 2580,2075 ccw(c2685,2075) 2685,1970 3369.44,1970 cw(c3369.44,1890) v2(3449.44,1890) 3449.44,1317.23
NetLC8_1: LC8.1 U1_ATTEN1.4 U1_ATTEN2.4 U1_ATTEN4.4 U1_ATTEN5.4 | length 6157.2
  Top Layer w6: v2(2618.7,2075.94) ccw(c2555.17,2139.47) 2645.02,2139.47 2645.02,2294.67 2655.66,2305.32 U1_ATTEN4.4@2677.36,2305.32 ; v2(2645,2715) 2645.02,3019.67 2655.66,3030.32 U1_ATTEN5.4@2677.36,3030.32 ; v2(3479.44,1860) 3519.69,1900.25 ccw(c3459.94,1960) 3544.44,1960 3544.44,2090 cw(c3565.09,2090) 3565.09,2110.65 U1_ATTEN1.4@3576.79,2110.65 ; U1_ATTEN2.4@3577.36,1487.87 3567.89,1487.87 ccw(c3567.89,1465) 3545.02,1465 3545.02,1350.02 3497.23,1302.23 v2(3480.02,1302.23) 3480.02,1275.79 ccw(c3670.04,1275.79) 3670.04,1085.77 4859.23,1085.77 ; 4860,1085 ccw(c4859.23,1085) 4859.23,1085.77 ; LC8.1@6025,1306.69 6025,1255 5855.77,1085.77 4859.23,1085.77
  Interconnects w6: v2(2645,2715) ccw(c2708.49,2651.51) 2618.7,2651.51 v2(2618.7,2075.94) ccw(c2704.64,2075.94) 2704.64,1990 3395,1990 cw(c3395,1905) 3480,1905 v2@3480,1860 ; v2@3479.44,1302.23 v2(3479.44,1860)
NetLC9_1: LC9.1 U1_ATTEN3.4 U10.11 | length 1832.8
  Top Layer w6: U1_ATTEN3.4@4982.35,2561.09 4960.65,2561.09 4950,2550.44 4950,2290 5040,2200 5200,2200 5260,2140 v2(5260,2099.85) ; U10.11@5158.27,1750 5225,1750 5260,1785 v2(5260,2015) 5455,2015 5565,2125 LC9.1@5906.69,2125
  Interconnects w6: v2(5260,2015) v2(5260,2099.85)
NetLC10_1: LC10.1 RL16.1 U1_ATTEN3.5 | length 2002.3
  Top Layer w6: U1_ATTEN3.5@4992.35,2541.4 4992.35,2307.65 5050,2250 5275,2250 v2(5375,2150) 5450,2150 5575,2275 LC10.1@5906.69,2275 ; v2(5375,1710) 5375,1582.56 RL16.1@5495,1462.56
  Interconnects w6: v2(5375,1710) v2(5375,2150)
NetR1_2: R1.2 U1.4 | length 118.8
  Top Layer w17: R1.2@3702.56,2775 U1.4@3702.56,2893.82
NetR1_ATTEN1_1: R1_ATTEN1.1 U1_ATTEN1.17 | length 122.7
  Top Layer w8: U1_ATTEN1.17@3669.11,2202.97 3669.11,2247.46 R1_ATTEN1.1@3724.43,2302.77
NetR1_ATTEN2_1: R1_ATTEN2.1 U1_ATTEN2.17 | length 122.7
  Top Layer w8: U1_ATTEN2.17@3669.69,1580.2 3669.69,1624.69 R1_ATTEN2.1@3725,1680
NetR1_ATTEN3_1: R1_ATTEN3.1 U1_ATTEN3.17 | length 122.7
  Top Layer w8: U1_ATTEN3.17@5074.67,2653.41 5074.67,2697.9 R1_ATTEN3.1@5129.98,2753.21
NetR1_ATTEN4_1: R1_ATTEN4.1 U1_ATTEN4.17 | length 122.7
  Top Layer w8: U1_ATTEN4.17@2769.68,2397.64 2769.68,2442.13 R1_ATTEN4.1@2825,2497.44
NetR1_ATTEN5_1: R1_ATTEN5.1 U1_ATTEN5.17 | length 122.7
  Top Layer w8: U1_ATTEN5.17@2769.68,3122.64 2769.68,3167.13 R1_ATTEN5.1@2825,3222.44
NetR2_ATTEN1_1: R2_ATTEN1.1 U1_ATTEN1.15 | length 207.5
  Top Layer w8: U1_ATTEN1.15@3722.06,2169.7 3741.35,2169.7 R2_ATTEN1.1@3874.43,2302.77
NetR2_ATTEN2_1: R2_ATTEN2.1 U1_ATTEN2.15 | length 207.5
  Top Layer w8: U1_ATTEN2.15@3722.64,1546.93 3741.93,1546.93 R2_ATTEN2.1@3875,1680
NetR2_ATTEN3_1: R2_ATTEN3.1 U1_ATTEN3.15 | length 190.9
  Top Layer w8: U1_ATTEN3.15@5127.62,2620.14 5146.91,2620.14 5239.98,2713.21 R2_ATTEN3.1@5239.98,2753.21
NetR2_ATTEN4_1: R2_ATTEN4.1 U1_ATTEN4.15 | length 207.5
  Top Layer w8: U1_ATTEN4.15@2822.64,2364.37 2841.93,2364.37 R2_ATTEN4.1@2975,2497.44
NetR2_ATTEN5_1: R2_ATTEN5.1 U1_ATTEN5.15 | length 207.5
  Top Layer w8: U1_ATTEN5.15@2822.64,3089.37 2841.93,3089.37 R2_ATTEN5.1@2975,3222.44
NetR3_ATTEN1_1: R3_ATTEN1.1 U1_ATTEN1.16 | length 173.5
  Top Layer w8: U1_ATTEN1.16@3688.8,2202.97 3688.8,2239.7 3714.43,2265.33 3761.98,2265.33 R3_ATTEN1.1@3799.43,2302.77
NetR3_ATTEN2_1: R3_ATTEN2.1 U1_ATTEN2.16 | length 173.5
  Top Layer w8: U1_ATTEN2.16@3689.37,1580.2 3689.37,1616.93 3715,1642.56 3762.56,1642.56 R3_ATTEN2.1@3800,1680
NetR3_ATTEN3_1: R3_ATTEN3.1 U1_ATTEN3.16 | length 167.6
  Top Layer w8: U1_ATTEN3.16@5094.35,2653.41 5094.35,2690.14 5119.98,2715.77 5147.54,2715.77 R3_ATTEN3.1@5184.98,2753.21 ; R3_ATTEN3.1@5194.98,2743.21 5204.98,2753.21
NetR3_ATTEN4_1: R3_ATTEN4.1 U1_ATTEN4.16 | length 173.5
  Top Layer w8: U1_ATTEN4.16@2789.37,2397.64 2789.37,2434.37 2815,2460 2862.56,2460 R3_ATTEN4.1@2900,2497.44
NetR3_ATTEN5_1: R3_ATTEN5.1 U1_ATTEN5.16 | length 173.5
  Top Layer w8: U1_ATTEN5.16@2789.37,3122.64 2789.37,3159.37 2815,3185 2862.56,3185 R3_ATTEN5.1@2900,3222.44
NetR4_ATTEN1_1: R4_ATTEN1.1 U1_ATTEN1.1 | length 207.5
  Top Layer w8: R4_ATTEN1.1@3424.43,2302.77 3557.5,2169.7 U1_ATTEN1.1@3576.79,2169.7
NetR4_ATTEN2_1: R4_ATTEN2.1 U1_ATTEN2.1 | length 207.5
  Top Layer w8: R4_ATTEN2.1@3425,1680 3558.07,1546.93 U1_ATTEN2.1@3577.36,1546.93
NetR4_ATTEN3_1: R4_ATTEN3.1 U1_ATTEN3.1 | length 190.9
  Top Layer w8: R4_ATTEN3.1@4869.98,2753.21 4869.98,2713.21 4963.06,2620.14 U1_ATTEN3.1@4982.35,2620.14
NetR4_ATTEN4_1: R4_ATTEN4.1 U1_ATTEN4.1 | length 207.5
  Top Layer w8: R4_ATTEN4.1@2525,2497.44 2658.07,2364.37 U1_ATTEN4.1@2677.36,2364.37
NetR4_ATTEN5_1: R4_ATTEN5.1 U1_ATTEN5.1 | length 207.5
  Top Layer w8: R4_ATTEN5.1@2525,3222.44 2658.07,3089.37 U1_ATTEN5.1@2677.36,3089.37
NetR5_ATTEN1_1: R5_ATTEN1.1 U1_ATTEN1.19 | length 122.7
  Top Layer w8: R5_ATTEN1.1@3574.43,2302.77 3629.74,2247.46 U1_ATTEN1.19@3629.74,2202.97
NetR5_ATTEN2_1: R5_ATTEN2.1 U1_ATTEN2.19 | length 122.7
  Top Layer w8: R5_ATTEN2.1@3575,1680 3630.32,1624.68 U1_ATTEN2.19@3630.32,1580.2
NetR5_ATTEN3_1: R5_ATTEN3.1 U1_ATTEN3.19 | length 122.7
  Top Layer w8: R5_ATTEN3.1@4979.98,2753.21 5035.3,2697.9 U1_ATTEN3.19@5035.3,2653.41
NetR5_ATTEN4_1: R5_ATTEN4.1 U1_ATTEN4.19 | length 122.7
  Top Layer w8: R5_ATTEN4.1@2675,2497.44 2730.32,2442.13 U1_ATTEN4.19@2730.32,2397.64
NetR5_ATTEN5_1: R5_ATTEN5.1 U1_ATTEN5.19 | length 122.7
  Top Layer w8: R5_ATTEN5.1@2675,3222.44 2730.32,3167.13 U1_ATTEN5.19@2730.32,3122.64
NetR6_ATTEN1_1: R6_ATTEN1.1 U1_ATTEN1.20 | length 173.5
  Top Layer w8: R6_ATTEN1.1@3499.43,2302.77 3536.87,2265.33 3584.43,2265.33 3610.06,2239.7 U1_ATTEN1.20@3610.06,2202.97
NetR6_ATTEN2_1: R6_ATTEN2.1 U1_ATTEN2.20 | length 173.5
  Top Layer w8: R6_ATTEN2.1@3500,1680 3537.44,1642.56 3585,1642.56 3610.63,1616.93 U1_ATTEN2.20@3610.63,1580.2
NetR6_ATTEN3_1: R6_ATTEN3.1 U1_ATTEN3.20 | length 167.6
  Top Layer w8: 4904.98,2753.21 R6_ATTEN3.1@4914.98,2743.21 ; R6_ATTEN3.1@4924.98,2753.21 4962.43,2715.77 4989.98,2715.77 5015.61,2690.14 U1_ATTEN3.20@5015.61,2653.41
NetR6_ATTEN4_1: R6_ATTEN4.1 U1_ATTEN4.20 | length 173.5
  Top Layer w8: R6_ATTEN4.1@2600,2497.44 2637.44,2460 2685,2460 2710.63,2434.37 U1_ATTEN4.20@2710.63,2397.64
NetR6_ATTEN5_1: R6_ATTEN5.1 U1_ATTEN5.20 | length 173.5
  Top Layer w8: R6_ATTEN5.1@2600,3222.44 2637.44,3185 2685,3185 2710.63,3159.37 U1_ATTEN5.20@2710.63,3122.64
NetR7_ATTEN1_1: R7_ATTEN1.1 U1_ATTEN1.3 | length 171.9
  Top Layer w6: R7_ATTEN1.1@3499.44,2002.56 3499.44,2052.98 cw(c3576.79,2052.98) 3508.22,2088.78 cw(c3576.79,2052.98) 3540.99,2121.55 cw(c3576.79,2052.98) U1_ATTEN1.3@3576.79,2130.33
NetR7_ATTEN2_1: R7_ATTEN2.1 U1_ATTEN2.3 | length 121.9
  Top Layer w6: R7_ATTEN2.1@3500.02,1429.79 3500.02,1430.21 cw(c3577.36,1430.21) 3508.8,1466.01 cw(c3577.36,1430.21) 3541.56,1498.78 cw(c3577.36,1430.21) U1_ATTEN2.3@3577.36,1507.56
NetR7_ATTEN3_1: R7_ATTEN3.1 U1_ATTEN3.3 | length 175.6
  Top Layer w6: R7_ATTEN3.1@4905,2453 4905,2530.44 4955.33,2580.77 U1_ATTEN3.3@4982.35,2580.77
NetR7_ATTEN4_1: R7_ATTEN4.1 U1_ATTEN4.3 | length 175.6
  Top Layer w6: R7_ATTEN4.1@2600.02,2197.23 2600.02,2274.67 2650.35,2325 U1_ATTEN4.3@2677.36,2325
NetR7_ATTEN5_1: R7_ATTEN5.1 U1_ATTEN5.3 | length 175.6
  Top Layer w6: R7_ATTEN5.1@2600.02,2922.23 2600.02,2999.67 2650.35,3050 U1_ATTEN5.3@2677.36,3050
NetR20_1: R20.1 U2.4 | length 130.9
  Top Layer w7: R20.1@3977.56,2675 3991.72,2675 cw(c3991.72,2606.72) 4040,2655 ccw(c4082.49,2697.49) 4082.49,2637.4 U2.4@4098.43,2637.4
NetR21_1: R21.1 U2.5 | length 1046
  Top Layer w7: v2(4000,2620) 4004.25,2615.75 U2.5@4087.6,2615.75 ; R21.1@4635,2002.56 v2(4635,2090)
  Interconnects w7: v2(4000,2620) 4030,2590 4030,2565 4355,2240 4485,2240 v2(4635,2090)
NetR22_1: R22.1 U2.6 | length 1028
  Top Layer w7: v2(3975,2585) 4000,2585 4015,2600 U2.6@4087.6,2600 ; R22.1@4580,2002.56 v2(4580,2050)
  Interconnects w7: v2(3975,2585) 4345,2215 4475,2215 4580,2110 v2(4580,2050)
NetR23_1: R23.1 U2.7 | length 1004.8
  Top Layer w7: v2(3950,2550) 4000,2550 4034.25,2584.25 U2.7@4087.6,2584.25 ; R23.1@4525,2002.56 v2(4525,2090)
  Interconnects w7: v2(3950,2550) 4310,2190 4425,2190 v2(4525,2090)
NetR24_2: R24.2 U8.5 | length 2536.7
  Top Layer w7: U8.5@2113.82,2583.19 2243.6,2583.19 2270.41,2610 3730,2610 v2(3795,2545) ; R24.2@4360,2002.56 v2(4360,2050)
  Interconnects w7: v2(3795,2545) 4215,2125 4285,2125 v2(4360,2050)
NetR25_2: R25.2 U8.6 | length 2625.2
  Top Layer w7: U8.6@2113.82,2598.94 2237.08,2598.94 2268.14,2630 3740,2630 3790,2580 v2(3820,2580) ; R25.2@4415,2002.56 v2(4415,2090)
  Interconnects w7: v2(3820,2580) 4250,2150 4355,2150 v2(4415,2090)
NetR26_2: R26.2 U8.7 | length 2701.9
  Top Layer w7: U8.7@2113.82,2614.69 2230.55,2614.69 2265.86,2650 3755,2650 3790,2615 v2(3845,2615) ; R26.2@4470,2002.56 v2(4470,2050)
  Interconnects w7: v2(3845,2615) 3985.25,2474.75 ; 3985.32,2474.82 4290.14,2170 4410,2170 4470,2110 v2(4470,2050)
NetR31_1: R31.1 U8.4 | length 97.5
  Top Layer w7: U8.4@2103,2561.54 ccw(c2130.86,2589.4) 2130.86,2550 R31.1@2197.44,2550
NetRL7_1: RL7.1 U10.6 | length 367.5
  Top Layer w7: RL7.1@4725,1502.56 4725,1535 4865,1675 4865,1725 4890,1750 U10.6@4941.73,1750
NetRL8_1: RL8.1 U10.7 | length 271.8
  Top Layer w7: RL8.1@4800,1502.56 4800,1585 4915,1700 U10.7@4941.73,1700
NetT2-A_1: T2-A.1 T2-B.1 | length 19026.5
  Top Layer w17: T2-A.1@1300,4995 1495,4995 ccw(c1495,5375) 1875,5375 cw(c2300,5375) 2300,5800 5100,5800 cw(c5100,5600) 5300,5600 cw(c5100,5600) 5228.37,5446.63 cw(c5100,5600) 5100,5400 2450,5400 ccw(c2450,5200) 2250,5200 ccw(c2450,5200) 2450,5000 5100,5000 cw(c5100,4800) 5300,4800 cw(c5100,4800) 5100,4600 2400,4600 ccw(c2400,4400) 2293.28,4569.15 ccw(c2400,4400) 2200,4400 ccw(c2400,4400) 2400,4200 5200,4200 ccw(c5200,4625) 5625,4625 cw(c5995,4625) 5995,4995 T2-B.1@6200,4995
SW_1: CONT.11 LC5.3 | length 528.1
  Top Layer w7: LC5.3@5868.31,2050 5975,2050 6025,2000 6025,1765 6075,1715 v2(6075,1670)
  other v2: 6075,1538
SW_2: CONT.10 LC1.3 | length 559.8
  Top Layer w6: LC1.3@5925,1393.31 6025,1493.31 6025,1725 5975,1775 CONT.10@5975,1891
  other v2: 5975,1820 5975,1952
SW_3: CONT.8 LC2.3 | length 584.9
  Top Layer w6: LC2.3@5625,1393.31 5716.69,1485 5805,1485 5825,1505 5825,1780 CONT.8@5870,1825
  other v2: 5875,1820 5875,1952
pads on no net: L1.4 L2.4 N1.1 U1.5 U1_ATTEN1.0 U1_ATTEN1.7 U1_ATTEN1.8 U1_ATTEN2.0 U1_ATTEN2.7 U1_ATTEN2.8 U1_ATTEN3.0 U1_ATTEN3.7 U1_ATTEN3.8 U1_ATTEN4.0 U1_ATTEN4.7 U1_ATTEN4.8 U1_ATTEN5.0 U1_ATTEN5.7 U1_ATTEN5.8 U2.8 U2.12 U2.14 U8.2 U8.3 U8.8 U8.9 U8.10 U8.12 U8.14 U10.9

## Polygon pours and split planes (outlines as drawn)
GND on Gnd 1 "Bottom Layer-No Net" (solid, pour order 46): 1050,1050 6450,1050 6450,5950 1050,5950 1050,1050
3V3 on Interconnects "Bottom Layer-No Net" (solid, pour order 45): 1050,1050 6450,1050 6450,3950 1050,3950 1050,1050
GND on Gnd 2 "Bottom Layer-No Net" (solid, pour order 44): 1050,1050 1050,3950 6450,3950 6450,1050 1050,1050
GND on Top Layer "Bottom Layer-No Net" (solid, pour order 43): 2745,2391.3 2755,2391.3 2755,2456.3 2785,2486.3 2785,2592.44 2715,2592.44 2715,2486.3 2745,2456.3
GND on Top Layer "Bottom Layer-No Net" (solid, pour order 42): 2745,3116.3 2755,3116.3 2755,3181.3 2785,3211.3 2785,3317.44 2715,3317.44 2715,3211.3 2745,3181.3
GND on Top Layer "Bottom Layer-No Net" (solid, pour order 41): 3644.43,2196.63 3654.43,2196.63 3654.43,2261.63 3684.43,2291.63 3684.43,2397.77 3614.43,2397.77 3614.43,2291.63 3644.43,2261.63
GND on Top Layer "Bottom Layer-No Net" (solid, pour order 40): 5049.98,2647.07 5059.98,2647.07 5059.98,2712.07 5089.98,2742.07 5089.98,2848.21 5019.98,2848.21 5019.98,2742.07 5049.98,2712.07
GND on Top Layer "Bottom Layer-No Net" (solid, pour order 39): 3645,1573.86 3655,1573.86 3655,1638.86 3685,1668.86 3685,1775 3615,1775 3615,1668.86 3645,1638.86
GND on Top Layer "Bottom Layer-No Net" (solid, pour order 38): 3100,1450 3210,1450 3210,1600 3100,1600
GND on Top Layer "Bottom Layer-No Net" (solid, pour order 35): 2975,1390 2975,1500 2825,1500 2825,1390
GND on Top Layer "Bottom Layer-No Net" (solid, pour order 34): 2897.46,2252.54 2840,2310 2810,2310 2810,2265 2790,2265 2790,2100 2897.46,2100
GND on Top Layer "Bottom Layer-No Net" (solid, pour order 33): 2898.73,2976.27 2841.27,3033.73 2811.27,3033.73 2811.27,2988.73 2791.27,2988.73 2791.27,2823.73 2898.73,2823.73
GND on Top Layer "Bottom Layer-No Net" (solid, pour order 32): 3796.88,2057.87 3739.43,2115.33 3709.43,2115.33 3709.43,2070.33 3689.43,2070.33 3689.43,1905.33 3796.88,1905.33
GND on Top Layer "Bottom Layer-No Net" (solid, pour order 31): 5202.44,2508.32 5144.98,2565.77 5114.98,2565.77 5114.98,2520.77 5094.98,2520.77 5094.98,2355.77 5202.44,2355.77
GND on Top Layer "Bottom Layer-No Net" (solid, pour order 30): 3797.46,1435.1 3740,1492.56 3710,1492.56 3710,1447.56 3690,1447.56 3690,1282.56 3797.46,1282.56
no net on Top Solder "Bottom Layer-No Net" (solid): 6500,6000 6500,4050 5950,4050 1000,4050 1000,6000
no net on Top Solder "Bottom Layer-No Net" (solid): 4275,2330 4275,3010 6500,3010 6500,2330
no net on Top Solder "Bottom Layer-No Net" (solid): 1370,3420 1370,3360 2030,3360 2030,3440 1370,3440
no net on Top Solder "Bottom Layer-No Net" (solid): 1370,2620 1370,2560 2013.43,2560 2013.43,2640 1370,2640
no net on Top Solder "Bottom Layer-No Net" (solid): 1370,2220 1370,2160 1985,2160 1985,2240 1370,2240
no net on Top Solder "Bottom Layer-No Net" (solid): 1370,3020 1370,2960 1890,2960 1890,3040 1370,3040
no net on Top Solder "Bottom Layer-No Net" (solid): 4300,2665 4300,1650 4115,1465 3800,1465 3765,1500 3765,1550 3855,1640 3930,1640 4020,1730 4020,1870 3770,2120 3770,2175 3865,2270 3915,2270 3950,2305 3950,2495 3990,2535 4172.99,2535 4190,2552.01 4190,2635 4160,2665
no net on Top Solder "Bottom Layer-No Net" (solid): 4000,2515 3130,2515 3080,2465 2960,2465 2865,2370 2865,2320 2995,2190 2995,2120 2920,2045 2540,2045 2540,2230 2640,2330 2640,2365 2570,2435 2240,2435 2140,2535 1965,2535 1965,2075 2180,1860 3265,1860 3535,2130 3535,2175 3450,2260 3365,2260 3335,2290 3335,2370 3385,2420 4000,2420
no net on Top Solder "Bottom Layer-No Net" (solid): 3330,1545 3330,1485 3500,1485 3500,1565 3330,1565
no net on Top Solder "Bottom Layer-No Net" (solid): 4300,2650 4300,3625 4025,3900 3475,3900 3410,3834.13 3410,3650 2100,3650 1975,3525 1975,3175 1850,3050 1850,2635 2013.43,2635 2013.43,2661.93 2236.93,2661.93 2625,3050 2625,3100 2550,3175 2500,3175 2450,3225 2450,3350 2500,3400 3000,3400 3050,3350 3050,3225 3000,3175 2945,3175 2870,3100 2870,3045 3140,2775 3950,2775 4075,2650
no net on Bottom Solder "Bottom Layer-No Net" (solid): 6500,1000 1050,1000 1050,4000 6500,4000 6500,1000

## Other copper
Top Layer:
  rectangle net GND: 5825,2528 6025,2575
  rectangle net GND: 5825,2625 6025,2708
  rectangle net GND: 5325,2528 5525,2575
  rectangle net GND: 5325,2625 5525,2708
  rectangle net GND: 4325,2528 4525,2575
  rectangle net GND: 4325,2625 4525,2708
  rectangle net GND: 3325,3750 3400,3850
  rectangle net GND: 3340,2960 3490,3040
  rectangle net GND: 3575,2725 3650,2825
  rectangle net GND: 1600,2128 1800,2175
  rectangle net GND: 1600,2225 1800,2308
  rectangle net GND: 1600,3328 1800,3375
  rectangle net GND: 1600,3425 1800,3508
  rectangle net GND: 1600,2928 1800,2975
  rectangle net GND: 1600,3018 1800,3108
  rectangle net GND: 1600,2528 1800,2575
  rectangle net GND: 1600,2625 1800,2708
  rectangle net 3V3: 5660,2730 5735,2825
  rectangle net 3V3: 4690,2730 4765,2825
  rectangle net GND: 4665,2880 4790,2940
  rectangle net GND: 5635,2880 5760,2940
  region net 3V3: 6104.88,3515 6104.88,3385 6164.88,3385 6164.88,3515
  region net GND: 5795.12,3385 5795.12,3515 5735.12,3515 5735.12,3385

## Silkscreen, mask and mechanical layers (free items; w line width, h text height)
Top Overlay:
  lines w10: 1000,4000 6500,4000 ; 1000,4050 6500,4050 ; 1000,1000 1000,6000 6500,6000 6500,1000 1000,1000
  text "Impedance Characterization Test line" at 2660,4360 h60
  text "EORE Integrated system" at 4290,3780 h80
  text "test PCB" at 4500,3600 h80
  text "R2" at 1140,1630 h60
  text "SVN:" at 1135,1545 h60
  text ".VersionControl_RevNumber" at 1355,1545 h60
  text ".Print_Date" at 1135,1460 h60
Top Paste:
  lines w10: 1000,1000 1000,4000 6500,4000 6500,1000 1000,1000
Top Solder:
  drawing of 30 lines, arcs and shapes, not listed
Bottom Solder:
  drawing of 132 lines, arcs and shapes, not listed
Mechanical 15:
  lines w8: 1060,1060 1200,1200 ; 1060,1340 1200,1200 ; 1060,3660 1200,3800 ; 1060,3940 1200,3800 ; 1340,1060 1200,1200 ; 1340,1340 1200,1200 ; 1340,3660 1200,3800 ; 1340,3940 1200,3800 ; 2560,1060 2700,1200 ; 2560,1340 2700,1200 ; 2560,3660 2700,3800 ; 2560,3940 2700,3800 ; 2840,1060 2700,1200 ; 2840,1340 2700,1200 ; 2840,3660 2700,3800 ; 2840,3940 2700,3800 ; 6160,1060 6300,1200 ; 6160,1340 6300,1200 ; 6160,3660 6300,3800 ; 6160,3940 6300,3800 ; 6440,1060 6300,1200 ; 6440,1340 6300,1200 ; 6440,3660 6300,3800 ; 6440,3940 6300,3800